# Altium PCB PCB_PROJECT.PcbDoc
Units mil, origin at the board's own origin, x right, y up, seen from the top; angles counter-clockwise.
Board outline 905.51 x 2594.49 mil, 4 copper layers (TOP, GND, VCC, BOTTOM), stack 60.756 mil thick; 50 components, 31 nets, 203 pads, 45 vias.
Unrouted connection lines stored in the file: 2.
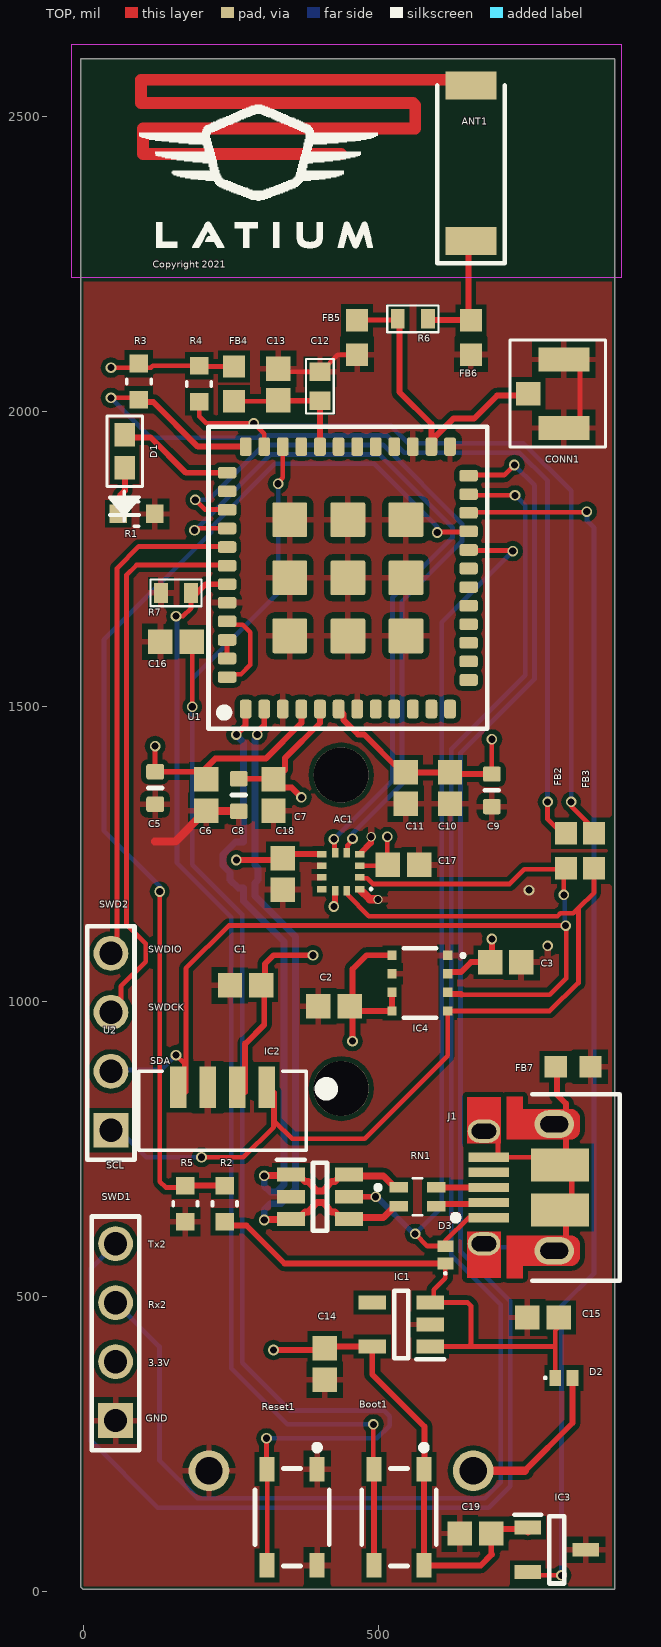
[diagram p0: TOP view]
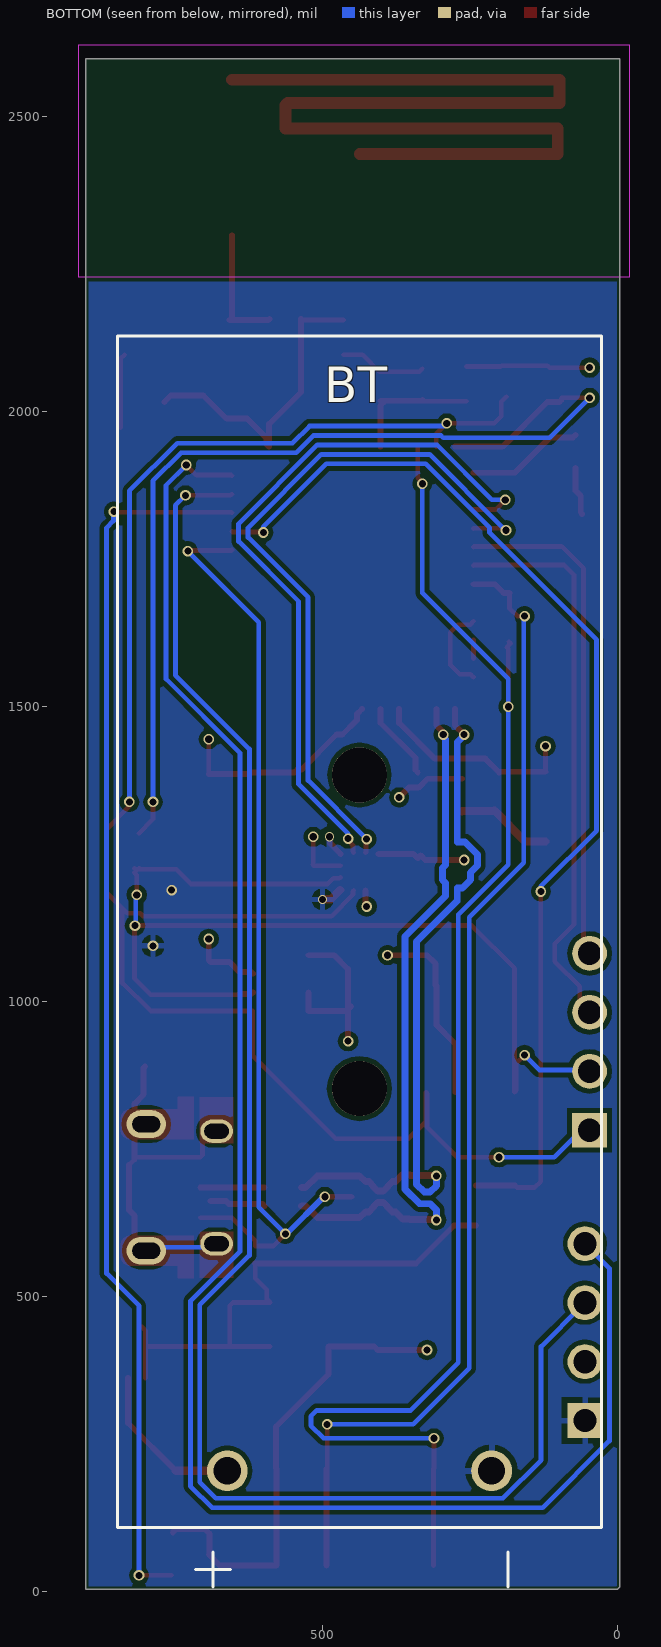
[diagram p1: BOTTOM view, seen from below]
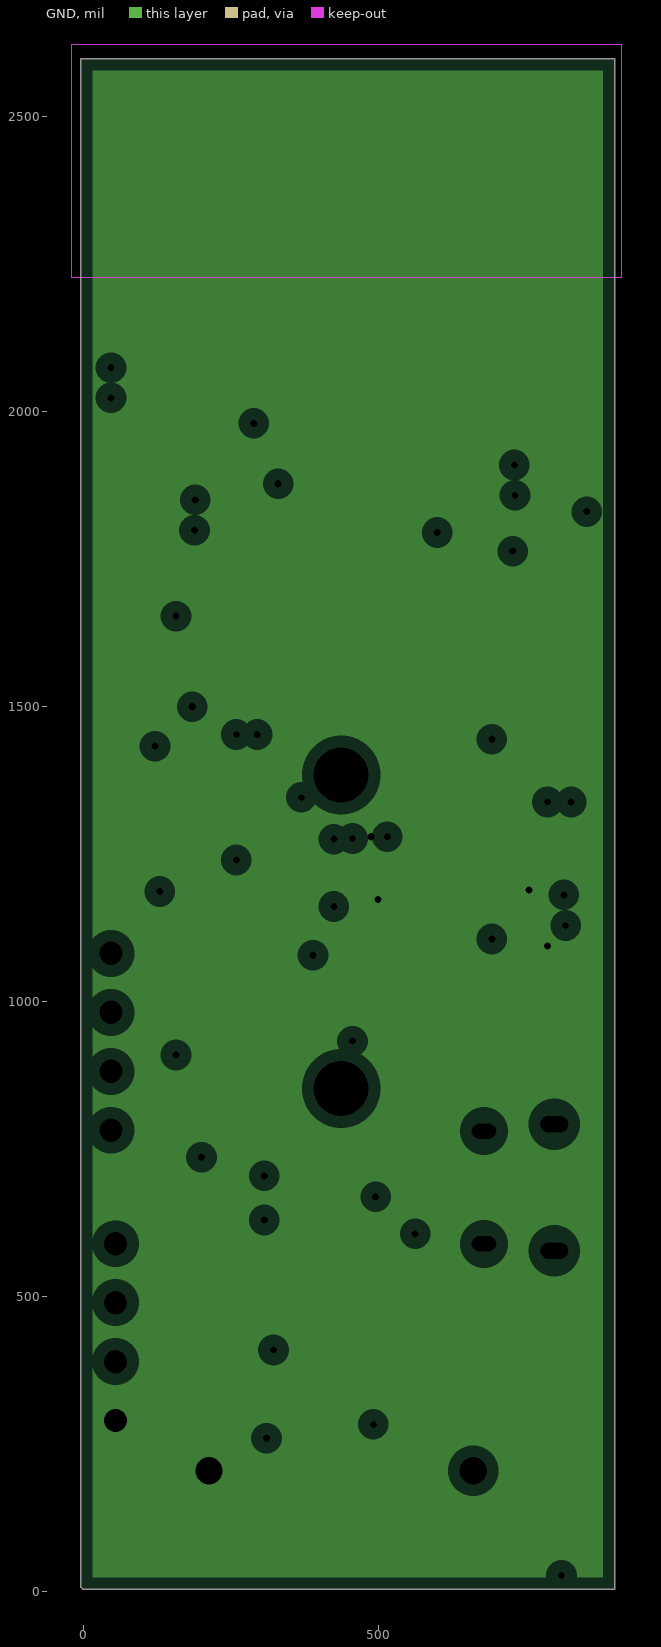
[diagram p2: GND, clearances drawn from the general rule]
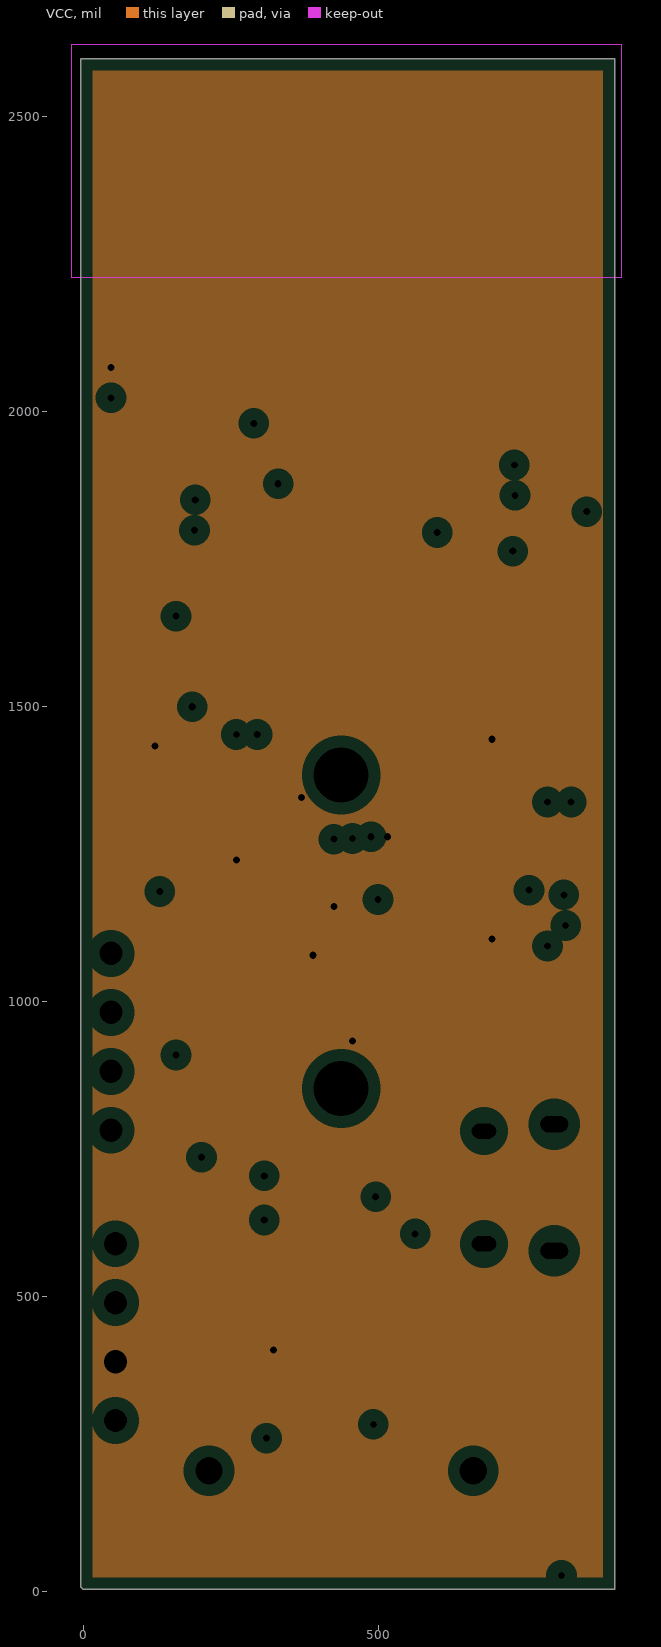
[diagram p3: VCC, clearances drawn from the general rule]
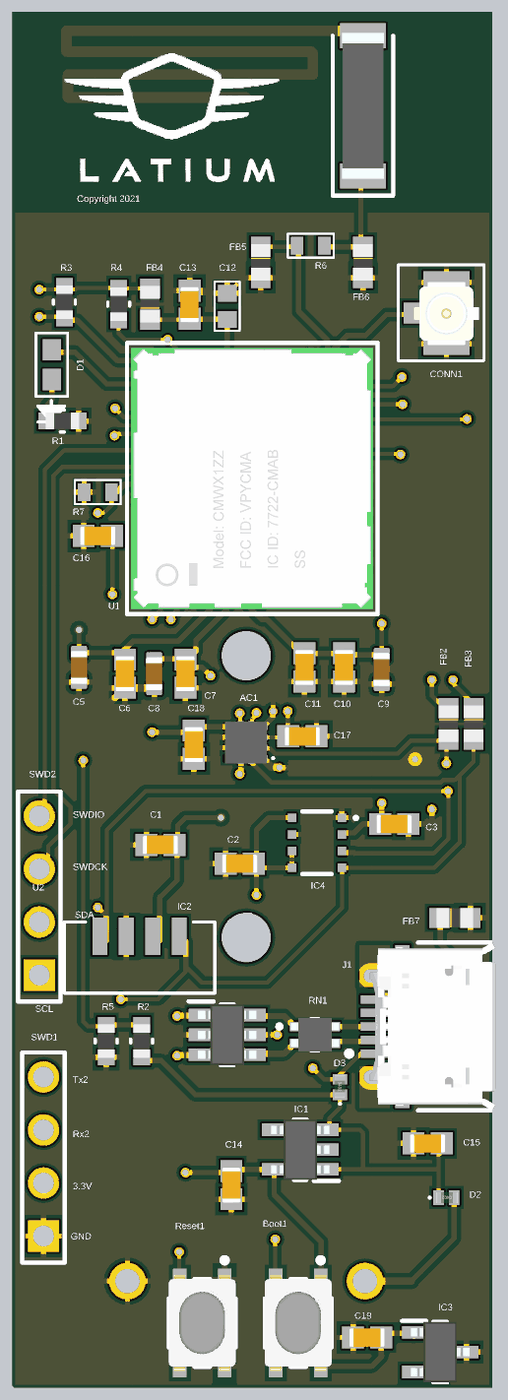
[diagram p4: 3D render of the assembled board from above, using the file's embedded part models]

## Layer stack, top to bottom
Top Solder: solder mask 0.4, Solder Resist, Dk 3.5
TOP: signal copper 1.4
Dielectric 1: core 9.1, 2116, Dk 4.2
GND: plane copper 1.378, net GND
Dielectric 3: prepreg 37, FR-4, Dk 4.2
VCC: plane copper 1.378, net 3V3
Dielectric 2: core 9.1, 2116, Dk 4.2
BOTTOM: signal copper 1.4
Bottom Solder: solder mask 0.4, Solder Resist, Dk 3.5

## Board outline
0,3.94 -3.94,7.87 -3.94,2598.43 901.57,2598.43 901.57,3.94

## Design rules (kind name [scope] priority, off if disabled: settings)
BoardOutlineClearance [All] p1: gap=5 ignorepadtopadclearanceinfootprint=FALSE
Clearance [All] p1: gap=8 ignorepadtopadclearanceinfootprint=TRUE
ComponentClearance [All] p1: gap=4 collisioncheckmode=3 verticalgap=4 showdistances=FALSE
DiffPairsRouting DiffPair_USBDiffPairsRouting [InDifferentialPair ('USB')] p1: maxlimit=8 minlimit=5 mostfreqgap=8 toplayer_minwidth=3.11 toplayer_maxwidth=13.58 toplayer_prefwidth=13.58 bottomlayer_minwidth=3.11 bottomlayer_maxwidth=13.58 bottomlayer_prefwidth=13.58 substack1={61CD507E-69E0-4F99-BC6C-F91D2F57CC11} substack2={735D745E-431D-49D2-AB04-4BDE5DF60375} substack3={4CBC7736-03FE-4B22-8C9A-F5819F3E1CB3} impedanceprofiledriven=TRUE impedanceprofileid={E19F0F90-F2E8-4607-B857-DBC723ACA318} impedanceprofilevalue=90.000000 maxuncoupledlength=500
DiffPairsRouting DiffPair_USBDiffPairsRouting_1 [InDifferentialPair ('NewDifferentialPair1')] p2: maxlimit=10 minlimit=10 mostfreqgap=10 toplayer_minwidth=15 toplayer_maxwidth=15 toplayer_prefwidth=15 bottomlayer_minwidth=15 bottomlayer_maxwidth=15 bottomlayer_prefwidth=15 maxuncoupledlength=500
DiffPairsRouting [All] p3: maxlimit=10 minlimit=10 mostfreqgap=10 toplayer_minwidth=15 toplayer_maxwidth=15 toplayer_prefwidth=15 bottomlayer_minwidth=15 bottomlayer_maxwidth=15 bottomlayer_prefwidth=15 maxuncoupledlength=500
HoleSize [All] p1: absolutevalues=TRUE maxlimit=400 minlimit=1 maxpercent=80.000 minpercent=20.000
MatchedLengths DiffPair_USBMatchedLengths [InDifferentialPair ('USB')] p1: tolerance=1000 checknetsindiffpair=FALSE checkdiffpairvsdiffpair=TRUE checkxsignals=TRUE checkothers=TRUE
MatchedLengths DiffPair_USBMatchedLengths_1 [InDifferentialPair ('NewDifferentialPair1')] p2: tolerance=1000 checknetsindiffpair=FALSE checkdiffpairvsdiffpair=TRUE checkxsignals=TRUE checkothers=TRUE
MinimumSolderMaskSliver [All] p1: minsoldermaskwidth=0
PlaneClearance [All] p1: clearance=20
PlaneConnect [All] p1: planeconnectstyle=Direct reliefexpansion=20 reliefentries=4 reliefconductorwidth=10 reliefairgap=10
PolygonConnect [All] p1: connectstyle=Relief reliefconductorwidth=10 reliefentries=4 polygonreliefangle="90 Angle" airgapwidth=10
RoutingVias [All] p1: holewidth=12 width=24 viastyle="Through Hole" minholewidth=12 minwidth=24 maxholewidth=12 maxwidth=24
SilkToSilkClearance [All] p1: silktosilkclearance=0
SilkToSolderMaskClearance [IsPad] p1: minsilkscreentomaskgap=0 clearancetoexposedcopper=TRUE
SolderMaskExpansion [All] p1: expansion=4
UnRoutedNet [All] p1: checkbadconnections=TRUE
Width [All] p1: maxlimit=16.32 minlimit=8 preferedwidth=10 substack1={61CD507E-69E0-4F99-BC6C-F91D2F57CC11} toplayer_{61cd507e-69e0-4f99-bc6c-f91d2f57cc11}_minwidth=10 toplayer_{61cd507e-69e0-4f99-bc6c-f91d2f57cc11}_maxwidth=10 bottomlayer_{61cd507e-69e0-4f99-bc6c-f91d2f57cc11}_minwidth=10 bottomlayer_{61cd507e-69e0-4f99-bc6c-f91d2f57cc11}_maxwidth=10 substack2={735D745E-431D-49D2-AB04-4BDE5DF60375} toplayer_{735d745e-431d-49d2-ab04-4bde5df60375}_minwidth=10 toplayer_{735d745e-431d-49d2-ab04-4bde5df60375}_maxwidth=10 bottomlayer_{735d745e-431d-49d2-ab04-4bde5df60375}_minwidth=10 bottomlayer_{735d745e-431d-49d2-ab04-4bde5df60375}_maxwidth=10 substack3={4CBC7736-03FE-4B22-8C9A-F5819F3E1CB3} toplayer_{4cbc7736-03fe-4b22-8c9a-f5819f3e1cb3}_minwidth=10 toplayer_{4cbc7736-03fe-4b22-8c9a-f5819f3e1cb3}_maxwidth=10 bottomlayer_{4cbc7736-03fe-4b22-8c9a-f5819f3e1cb3}_minwidth=10 bottomlayer_{4cbc7736-03fe-4b22-8c9a-f5819f3e1cb3}_maxwidth=10 minimp=50.000000 maximp=50.000000 favimp=50.000000
21 further rules are at their usual default settings.

## Classes and differential pairs
differential pair class USBDiffPair: USB
differential pair USB: +USB_P -USB_N

## Components (designator, comment, footprint, x,y, rotation, side; value= is the part's Value field where it differs from the comment)
AC1 "BMA490L" BMA280 437.01,1220.47 r180 top
ANT1 "0900AT43A0070E" ANTC7020X90N 657.48,2421.26 r90 top
Boot1 "PTS810SJM250SMTRLFS" FP-PTS810SJM250SMTRLFS-MFG 535.43,125.98 r270 top
BT "BC2AAAPC" BAT_BC2AAAPC 437.4,1118.31 r90 bottom
C1 "Capacitor 1 uF +/- 10% 25 V 0603" CAPC1608X90X40ML10T20 275.59,1027.56 r0 top value=1µF
C2 "Capacitor 100 nF +/-10% 50 V 0603" CAPC1608X90X40ML10T20 425.2,992.13 r0 top value=100nF
C3 "Capacitor 100 nF +/-10% 50 V 0603" CAPC1608X90X40ML10T20 716.54,1066.93 r180 top value=100nF
C5 "Capacitor 10µF +/-20% 10V 0603" CAPC0603(1608)100_L 122.05,1362.2 r90 top value=10µF
C6 "Capacitor 100 nF +/-10% 50 V 0603" CAPC1608X90X40ML10T20 208.66,1350.39 r90 top value=100nF
C7 "Capacitor 100 nF +/-10% 50 V 0603" CAPC1608X90X40ML10T20 322.83,1350.39 r90 top value=100nF
C8 "Capacitor 10µF +/-20% 10V 0603" CAPC0603(1608)100_L 263.78,1350.39 r90 top value=10µF
C9 "Capacitor 10µF +/-20% 10V 0603" CAPC0603(1608)100_L 692.91,1358.27 r90 top value=10µF
C10 "Capacitor 1 uF +/- 10% 25 V 0603" CAPC1608X90X40ML10T20 622.05,1362.2 r90 top value=1µF
C11 "Capacitor 100 nF +/-10% 50 V 0603" CAPC1608X90X40ML10T20 547.24,1362.2 r90 top value=100nF
C12 "10000PF" CAPC0603 401.57,2043.31 r270 top
C13 "Capacitor 1 uF +/- 10% 25 V 0603" CAPC1608X90X40ML10T20 330.71,2046.26 r90 top value=1µF
C14 "Capacitor 1 uF +/- 10% 25 V 0603" CAPC1608X90X40ML10T20 409.45,385.83 r270 top value=1µF
C15 "Capacitor 1 uF +/- 10% 25 V 0603" CAPC1608X90X40ML10T20 779.53,464.57 r180 top value=1µF
C16 "Capacitor 100 nF +/-10% 50 V 0603" CAPC1608X90X40ML10T20 157.48,1610.24 r180 top value=100nF
C17 "Capacitor 100 nF +/-10% 50 V 0603" CAPC1608X90X40ML10T20 543.31,1232.28 r180 top value=100nF
C18 "Capacitor 100 nF +/-10% 50 V 0603" CAPC1608X90X40ML10T20 338.58,1216.54 r90 top value=100nF
C19 "Capacitor 100 nF +/-10% 50 V 0603" CAPC1608X90X40ML10T20 665.35,98.43 r180 top value=100nF
CONN1 "U.FL-R-SMT-1" U.FL-R-SMT-1 814.96,2030.51 r270 top
D1 "APHD1608LQBC/D" "LED BLUE CLEAR [0603]" 70.87,1933.07 r90 top
D2 "SBR07U20LPS" CDBQR70HF 814.96,362.2 r0 top
D3 "SBR07U20LPS" CDBQR70HF 614.17,570.87 r90 top
FB2 "BLM18AG102SN1D" "Ferrite Bead" 818.9,1255.91 r270 top
FB3 "BLM18AG102SN1D" "Ferrite Bead" 866.14,1255.91 r270 top
FB4 "BLM18AG102SN1D" "Ferrite Bead" 255.91,2047.24 r90 top
FB5 "BLM18AG102SN1D" "Ferrite Bead" 464.57,2125.98 r270 top
FB6 "BLM18AG102SN1D" "Ferrite Bead" 657.48,2125.98 r270 top
FB7 "BLM18AG102SN1D" "Ferrite Bead" 830.71,889.76 r0 top
IC1 "TLV75533PDBVR" SOT95P280X145-5N 539.37,452.76 r180 top
IC2 "USBLC6-2SC6" SOT95P280X145-6N 401.57,669.29 r0 top
IC3 "SM353LT" SOT95P280X145-3N 803.15,70.87 r0 top
IC4 "BME680" BME680 570.87,1031.5 r180 top
J1 "10103594-0001LF" FCI-10103594-0001LF_V 744.09,685.04 r90 top
R1 "RES 4.7K 5% 0.1W [0603]" "RES 0603" 90.55,1826.77 r0 top
R2 "RES 27K 5% 0.1W [0603]" "RES 0603" 240.16,657.48 r270 top value=27K
R3 "RES 4.7K 5% 0.1W [0603]" "RES 0603" 94.49,2051.18 r90 top value=4.7K
R4 "RES 4.7K 5% 0.1W [0603]" "RES 0603" 196.85,2047.24 r90 top value=4.7K
R5 "RES 100K 5% 0.1W [0603]" "RES 0603" 173.23,657.48 r90 top value="100K Ohm"
R6 "RES 0 Ohm 5% 0.1W [0603]" RESC0603 559.06,2157.48 r0 top value="0 Ohm"
R7 "RES SMD 10K OHM 5% 0.1W 0603" RESC0603 157.48,1692.91 r0 top
Reset1 "PTS810SJM250SMTRLFS" FP-PTS810SJM250SMTRLFS-MFG 354.33,125.98 r270 top
RN1 "EXB34V220JX" EXB34V103JV 566.93,669.29 r270 top
SWD1 "68000-104HLF" 4POS_HEADER 55.12,389.76 r90 top
SWD2 "68000-104HLF" 4POS_HEADER 47.24,881.89 r90 top
U1 "TYPEABZ" CMWX1ZZABZ 448.82,1718.5 r90 top
U2 "VEML7700-TR" "Ambient Light Sensor with I2C" 236.22,814.96 r180 top

## Footprints (in the part's own frame and the unit in brackets; to place one, negate y for a bottom-side part, rotate by r counter-clockwise, add the part's x,y. Pads: shape width x height; smd on the part's side, far side on the other; paste and mask are expansions set on the pad)
4POS_HEADER [mm]
  rect 1.5x1.5 hole 1: 1(-2.54,0)
  round 1.5 hole 1: 2(0,0) 3(2.54,0) 4(5.08,0)
  silkscreen extent -3.81,-1.02 6.25,1.02, body extent -3.8,-1.03 3.83,1.03, height 11.34
"Ambient Light Sensor with I2C" [mil] "Ambient Light Sensor with I2C"
  rect 28x70 smd: 1(-75,-40) 2(-25,-40) 3(25,-40) 4(75,-40)
  silkscreen extent -186,-67 142,67, body extent -137,-62 138,62, height 91
ANTC7020X90N [mm]
  rect 1.2x2.2 smd: 1(-3.35,0) 2(3.35,0)
  silkscreen extent -4.3,-1.45 3.35,1.45, body extent -3.5,-1 3.5,1, height 0.9
BAT_BC2AAAPC [mm]
  round 1.755 hole 1.17: NEG(-23.205,-5.69) POS(-23.205,5.69)
  round 2.37 hole 2.37 unplated: ""(-6.745,0) ""(6.755,0)
  silkscreen extent -28.2,-10.41 25.66,10.41
BMA280 [mm]
  rect 0.41x0.28 smd: 1(-0.815,0.75) 2(-0.815,0.25) 3(-0.815,-0.25) 4(-0.815,-0.75) 7(0.815,-0.75) 8(0.815,-0.25) 9(0.815,0.25) 10(0.815,0.75)
  rect 0.28x0.41 smd: 5(-0.25,-0.815) 6(0.25,-0.815) 11(0.25,0.815) 12(-0.25,0.815)
  silkscreen extent -1.35,0.7 -1.25,0.8, body extent -1,-1 1,1, height 1.1
BME680 [mm]
  rect 0.4x0.4 smd: 1(-1.2,-1.2) 2(-1.2,-0.4) 3(-1.2,0.4) 4(-1.2,1.2) 5(1.2,1.2) 6(1.2,0.4) 7(1.2,-0.4) 8(1.2,-1.2)
  silkscreen extent -1.89,-1.5 0.7,1.5
CAPC0603 [mm] "Chip Capacitor 0603, 2-Leads, Body 1.60x0.80mm, IPC High Density"
  rect 0.8x0.9 smd: 1(-0.625,0) 2(0.625,0)
  silkscreen extent -1.17,-0.6 1.17,0.6, body extent -0.87,-0.48 0.87,0.48, height 0.85
CAPC0603(1608)100_L [mm] "Chip Capacitor, Body 1.6x0.8mm, Height 1.0mm, IPC High Density"
  rrect25% 0.66x0.76 smd: 1(-0.7,0) 2(0.7,0)
  silkscreen extent 0,-0.3 0,0.3, body extent -0.8,-0.4 0.8,0.4, height 0.95
CAPC1608X90X40ML10T20 [mm] "Chip Capacitor, 2-Leads, Body 1.70x0.90mm, IPC Low Density"
  rect 1.05x1.05 smd: 1(-0.675,0) 2(0.675,0)
  body extent -0.85,-0.45 0.85,0.45, height 0.9
CDBQR70HF [mm]
  rect 0.5x0.7 smd: 1(-0.375,0) 2(0.375,0)
  silkscreen extent -0.85,-0.05 -0.75,0.05, body extent -0.5,-0.25 0.55,0.25, height 0.32
CMWX1ZZABZ [mm] "muRata LoRa module"
  rrect40% 0.8x0.5 smd: 1(-5.65,4.4) 2(-5.65,3.6) 3(-5.65,2.8) 4(-5.65,2) 5(-5.65,1.2) 6(-5.65,0.4) 7(-5.65,-0.4) 8(-5.65,-1.2) 9(-5.65,-2) 10(-5.65,-2.8) 11(-5.65,-3.6) 12(-5.65,-4.4) 25(5.65,-4.4) 26(5.65,-3.6) 27(5.65,-2.8) 28(5.65,-2) 29(5.65,-1.2) 30(5.65,-0.4) 31(5.65,0.4) 32(5.65,1.2) 33(5.65,2) 34(5.65,2.8) 35(5.65,3.6) 36(5.65,4.4)
  rrect40% 0.5x0.8 smd: 13(-4.4,-5.2) 14(-3.6,-5.2) 15(-2.8,-5.2) 16(-2,-5.2) 17(-1.2,-5.2) 18(-0.4,-5.2) 19(0.4,-5.2) 20(1.2,-5.2) 21(2,-5.2) 22(2.8,-5.2) 23(3.6,-5.2) 24(4.4,-5.2) 37(4.525,5.2) 38(3.725,5.2) 39(2.925,5.2) 40(2.125,5.2) 41(1.325,5.2) 42(0.525,5.2) 43(-0.275,5.2) 44(-1.075,5.2) 45(-1.875,5.2) 46(-2.675,5.2) 47(-3.475,5.2) 48(-4.275,5.2)
  rrect10% 1.5x1.5 smd: 49(-2.5,2.5) 50(0,2.5) 51(2.5,2.5) 52(-2.5,0) 53(0,0) 54(2.5,0) 55(-2.5,-2.5) 56(0,-2.5) 57(2.5,-2.5)
  silkscreen extent -6.5,-6 6.5,6, body extent -6.25,-5.8 6.25,5.8, height 1.76
EXB34V103JV [mm]
  rect 0.45x0.8 smd: 1(-0.4,-0.8) 2(0.4,-0.8) 3(0.4,0.8) 4(-0.4,0.8)
  silkscreen extent -0.8,-1.8 0.8,0.2, body extent -0.8,-1.15 0.8,1.16, height 0.6
FCI-10103594-0001LF_V [mm] "SMD, 5-Leads, Body 8.04x5.62mm, Pitch 0.65 mm"
  rect 0.4x1.75 smd: 1(-1.3,1.435) 2(-0.65,1.435) 3(0,1.435) 4(0.65,1.435) 5(1.3,1.435)
  oval 1x1.4 hole 0.65 slot 1.05 at 90 deg: 6(-2.425,1.64) 7(2.425,1.64)
  oval 1.2x1.7 hole 0.7 slot 1.2 at 90 deg: 8(2.725,-1.39) 9(-2.725,-1.39)
  rect 1.425x2.5 smd: 10(-0.962,-1.64) 11(0.962,-1.64)
  TOP region: -3.9,0.91 -1.9,0.91 -1.9,2.37 -3.9,2.37
  TOP region: 3.9,2.37 1.9,2.37 1.9,0.91 3.9,0.91
  TOP region: -3.375,-0.04 -3.375,-2.09 -3.373,-2.129 -3.369,-2.167 -3.365,-2.185 -3.359,-2.203 -3.348,-2.239 -3.329,-2.277 -3.308,-2.312 -3.284,-2.344 -3.258,-2.374 -3.227,-2.401 -3.194,-2.426 -3.158,-2.446 -3.121,-2.464 -3.08,-2.477 -3.049,-2.483 -3.012,-2.488 -2.975,-2.49 -2.475,-2.49 -2.432,-2.488 -2.391,-2.482 -2.351,-2.471 -2.312,-2.456 -2.28,-2.439 -2.249,-2.421 -2.217,-2.397 -2.19,-2.37 -2.164,-2.342 -2.143,-2.312 -2.121,-2.277 -2.105,-2.241 -2.093,-2.209 -2.088,-2.192 -2.084,-2.175 -2.08,-2.155 -2.076,-2.134 -2.075,-2.112 -2.075,-2.09 -2.075,-0.04 -2.075,0.66 -3.9,0.66 -3.9,-0.04
  TOP region: 3.375,-0.04 3.375,-2.09 3.373,-2.129 3.369,-2.167 3.365,-2.185 3.359,-2.203 3.348,-2.239 3.329,-2.277 3.308,-2.312 3.284,-2.344 3.258,-2.374 3.227,-2.401 3.194,-2.426 3.158,-2.446 3.121,-2.464 3.08,-2.477 3.049,-2.483 3.012,-2.488 2.975,-2.49 2.475,-2.49 2.432,-2.488 2.391,-2.481 2.351,-2.471 2.312,-2.456 2.28,-2.439 2.249,-2.421 2.217,-2.396 2.19,-2.37 2.164,-2.342 2.143,-2.312 2.121,-2.277 2.105,-2.241 2.093,-2.209 2.088,-2.192 2.084,-2.175 2.08,-2.155 2.076,-2.134 2.075,-2.112 2.075,-2.09 2.075,-0.04 2.075,0.66 3.9,0.66 3.9,-0.04
  silkscreen extent -4.02,-4.21 4.02,2.98, body extent -4.02,-4.15 4.02,1.88, height 2.9
"Ferrite Bead" [mil]
  rect 38x37 smd: 1(-29.5,0) 2(29.5,0)
  body extent -34,-19 34,19, height 37
FP-PTS810SJM250SMTRLFS-MFG [mm]
  rect 1.05x0.65 smd paste+0 mask+0: 1(-2.075,1.075) 2(2.075,1.075) 3(-2.075,-1.075) 4(2.075,-1.075)
  silkscreen extent -3.12,-1.6 2.1,1.6, body extent -2.7,-1.7 2.7,1.7, height 0.25
"LED BLUE CLEAR [0603]" [mil] "LED BLUE CLEAR 0603 SMD"
  rect 40x35 smd: 1(-28,0) 2(28,0)
  silkscreen extent -118,-30 60,30, body extent -34,-14 34,14, height 28
"RES 0603" [mm]
  rect 0.756x0.8 smd: 1(-0.778,0) 2(0.778,0)
  silkscreen extent -0.09,-0.53 0.09,0.53, body extent -0.8,-0.4 0.8,0.4, height 0.71
RESC0603 [mm] "Chip Resistor 0603, 2-Leads, Body 1.60x0.82mm, IPC High Density"
  rect 0.6x0.85 smd: 1(-0.65,0) 2(0.65,0)
  silkscreen extent -1.1,-0.58 1.1,0.58, body extent -0.85,-0.48 0.85,0.48, height 0.6
SOT95P280X145-3N [mm]
  rect 1.15x0.6 smd: 1(-1.25,0.95) 2(-1.25,-0.95) 3(1.25,0)
  silkscreen extent -1.83,-1.45 0.33,1.5, body extent -1.4,-1.45 1.4,1.45, height 1.45
SOT95P280X145-5N [mm]
  rect 1.2x0.6 smd: 1(-1.25,0.95) 2(-1.25,0) 3(-1.25,-0.95) 4(1.25,-0.95) 5(1.25,0.95)
  silkscreen extent -1.85,-1.45 0.3,1.5, body extent -1.4,-1.45 1.4,1.45, height 1.45
SOT95P280X145-6N [mm]
  rect 1.2x0.6 smd: 1(-1.25,0.95) 2(-1.25,0) 3(-1.25,-0.95) 4(1.25,-0.95) 5(1.25,0) 6(1.25,0.95)
  silkscreen extent -1.85,-1.46 0.3,1.6, body extent -1.4,-1.46 1.4,1.46, height 1.45
U.FL-R-SMT-1 [mm]
  rect 1.05x2.2 smd: 1(-1.475,0) 2(1.475,0)
  rect 1x1.05 smd: 3(0,-1.525)
  silkscreen extent -2.31,-2.31 2.29,1.8, body extent -1.47,-1.55 1.53,1.55, height 1.25

## Part data
AC1: library part BMA280, "BMA490L Accelerometer", Manufacturer_Name="Bosch Sensortec", Mouser Part Number=262-BMA280, Arrow Part Number=BMA280, Arrow Price/Stock=https://www.arrow.com/en/products/bma280/bosch, ComponentLink1Description=docu, ComponentLink1URL=https://www.bosch-sensortec.com/media/boschsensortec/downloads/datasheets/bst-bma280-ds000.pdf, Datasheet Link=https://ae-bst.resource.bosch.com/media/_tech/media/datasheets/BST-BMA280-DS000.pdf, Height=1mm, Manufacturer_Part_Number=BMA280, Mouser Price/Stock=https://www.mouser.co.uk/ProductDetail/Bosch-Sensortec/BMA280?qs=d72FGnIDsgRcX8VH3KFYOw%3D%3D
ANT1: "Antenna", Manufacturer_Name="JOHANSON TECHNOLOGY", Datasheet Link=https://www.johansontechnology.com/datasheets/0900AT43A0070/0900AT43A0070.pdf, Height=0.9mm, Manufacturer_Part_Number=0900AT43A0070E
Boot1 Reset1: library part Button, "SWITCH TACTILE SPST-NO 0.05A 16V", Contact Current Rating=50mA, Contact Resistance=500mO, Manufacturer="C&K Components", Operating Force=160gf, Temperature="-40°C to +85°C", Temperature Range High=+85°C, Temperature Range Low=-40°C, Voltage Rating Dc=16V, Automotive=No, Category=Switch, ComponentLink2Description=Datasheet, ComponentLink2URL=https://www.ckswitches.com/media/1476/pts810.pdf, Device Class L1=Electromechanical, Device Class L2=Switches, Device Class L3="Tactile Switches", Digikey Description="SWITCH TACTILE SPST-NO 0.05A 16V", Electromechanical Life=150000Cycles, Height=2.7mm, Lead Free=Yes, Manufacturer Part Number=PTS810SJM250SMTRLFS, Mouser Description="Switch Tactile N.O. SPST Button J-Bend 0.05A 16VDC 150000Cycles 1.57N SMD T/R", Octopart=https://octopart.com/pts810+sjm+250+smtr+lfs-c%26k+components-29687929, Package=PTS810SJM250SMTRLFS, RoHS=TRUE, Throw Configuration=SPST
BT: "BATTERY HOLDER AAA 2 CELL PC PIN", Package=None, Availability=Unavailable, MF=MPD, MP=BC2AAAPC, Price=None, SnapEDA_Link=https://www.snapeda.com/parts/BC2AAAPC/MPD/view-part/4389080/?ref=snap
C1 C10 C13 C14 C15: library part CMP-001-00005-4, "Chip Capacitor, 1 uF, +/- 10%, 25 V, 0603 (1608 Metric)", Capacitor Type=Ceramic, Case/Package=0603, Max Operating Temperature=125°C, Min Operating Temperature=-55°C, Tolerance=10%, Voltage Rating=25V, Mounting Technology=SM, Pins=2, RoHS Compliant=True
C2 C3 C6 C7 C11 C16 C17 C18 C19: library part CMP-001-00017-4, "Chip Capacitor, 100 nF, +/- 10%, 50 V, 0603 (1608 Metric)", Capacitor Type=Ceramic, Case/Package=0603, Max Operating Temperature=125°C, Min Operating Temperature=-55°C, Tolerance=10%, Voltage Rating=50V, Mounting Technology=SM, Pins=2, RoHS Compliant=True
C5 C8 C9: library part CMP-001-00075-2, "Chip Capacitor, 10µF +/-20%, 10V, 0603, Thickness 1 mm", Case/Package=0402, Max Operating Temperature=85°C, Min Operating Temperature=-55°C, Tolerance=10%, Voltage Rating=10V, Mounting Technology=SMT, Pins=2
C12: library part GRM188R71H103KA01D, "CAP CER 10000PF 50V X7R 0603", Capacitance=10000pF, Manufacturer="Murata Electronics North America", Operating Temperature="-55°C ~ 125°C", Package / Case="0603 (1608 Metric)", Ratings=-, Supplier Part Number 1=490-1512-1-ND, Temperature Coefficient=X7R, Tolerance=±10%, Voltage - Rated=50V, Applications="General Purpose", Category=Capacitors, ComponentLink1Description=http://www.murata.com/~/media/webrenewal/support/library/catalog/products/capacitor/mlcc/c02e.ashx, ComponentLink1URL=http://www.murata.com/~/media/webrenewal/support/library/catalog/products/capacitor/mlcc/c02e.ashx, Features=-, Height - Seated (Max)=-, Lead Spacing=-, Lead Style=-, Manufacturer Part Number=GRM188R71H103KA01D, Mounting Type="Surface Mount, MLCC", Packaging="Cut Tape (CT)", Part Status=Active, Pricing 1="1=0.14, 10=0.031, 100=0.0135, 500=0.00966, 1000=0.00758 (CAD)", RoHS="RoHS Compliant", Size / Dimension="0.063\" L x 0.031\" W (1.60mm x 0.80mm)", Stock 1=5417714, Supplier 1=Digi-Key, Thickness (Max)="0.035\" (0.90mm)"
D1: library part "LED BLUE CLEAR 0603 SMD", "LED BLUE CLEAR 0603 SMD", Supplier Part Number 1=754-2034-1-ND, Datasheet=https://katalog.we-online.de/led/datasheet/150060BS75000.pdf, PN=150060BS75000, Supplier 1=Digi-Key
D2 D3: library part CDSQR4148-HF_1, "Diode", Arrow Part Number=CDSQR4148-HF, Manufacturer_Name="Comchip Technology", Mouser Part Number=750-CDSQR4148-HF, Arrow Price/Stock=https://www.arrow.com/en/products/cdsqr4148-hf/comchip-technology, ComponentLink1Description=SBR07U20LPS, ComponentLink1URL=https://www.diodes.com/assets/Datasheets/SBR07U20LPS.pdf, Datasheet Link=http://www.comchiptech.com/admin/files/product/CDSQR4148-HF-RevC213424.pdf, Height=0mm, Manufacturer_Part_Number=CDSQR4148-HF, Mouser Price/Stock=https://www.mouser.co.uk/ProductDetail/Comchip-Technology/CDSQR4148-HF?qs=2qJf6qQ4IOKNV97fk6Xvow%3D%3D
FB2 FB3 FB4 FB5 FB6 FB7: library part "Ferrite Bead", "Ferrite Bead 1KOhm @100MHz", Supplier Part Number 1=81-BLM11A102S, Datasheet=https://www.murata.com/en-us/products/productdata/8796738650142/ENFA0003.pdf?src-supplier=Digi-Key, PN=BLM18AG102SN1D, Supplier 1=Mouser
IC1: "Integrated Circuit", Manufacturer_Name="Texas Instruments", Mouser Part Number=595-TLV75533PDBVR, Arrow Part Number=TLV75533PDBVR, Arrow Price/Stock=https://www.arrow.com/en/products/tlv75533pdbvr/texas-instruments, Datasheet Link=http://www.ti.com/lit/gpn/tlv755p, Height=1.45mm, Manufacturer_Part_Number=TLV75533PDBVR, Mouser Price/Stock=https://www.mouser.co.uk/ProductDetail/Texas-Instruments/TLV75533PDBVR?qs=55YtniHzbhAKEwqeO2xJXQ%3D%3D
IC2: "Integrated Circuit", Manufacturer_Name=STMicroelectronics, Mouser Part Number=511-USBLC6-2SC6, Arrow Part Number=USBLC6-2SC6, Arrow Price/Stock=https://www.arrow.com/en/products/usblc6-2sc6/stmicroelectronics, Datasheet Link=http://www.st.com/st-web-ui/static/active/en/resource/technical/document/datasheet/CD00050750.pdf, Height=1.45mm, Manufacturer_Part_Number=USBLC6-2SC6, Mouser Price/Stock=https://www.mouser.co.uk/ProductDetail/STMicroelectronics/USBLC6-2SC6/?qs=po45yt2pPpu%2FhNIlwQdTlg%3D%3D
IC3: "Integrated Circuit", Manufacturer_Name=Honeywell, Mouser Part Number=785-SM353LT, Arrow Part Number=SM353LT, Arrow Price/Stock=https://www.arrow.com/en/products/sm353lt/honeywell, ComponentLink1Description=documentation, ComponentLink1URL=http://www.farnell.com/datasheets/2012450.pdf?_ga=2.245790722.741299232.1603476058-140605836.1598371586&_gac=1.141304070.1603476058.EAIaIQobChMItI734qXL7AIVmRatBh3JPwF_EAAYAiAAEgIk7PD_BwE, Datasheet Link=http://uk.rs-online.com/web/p/products/8252612, Height=1.45mm, Manufacturer_Part_Number=SM353LT, Mouser Price/Stock=https://www.mouser.co.uk/ProductDetail/Honeywell/SM353LT?qs=sJdZgDoFdSW3aINL1oUyuA%3D%3D
IC4: "Integrated Circuit", Manufacturer_Name="Bosch Sensortec", Mouser Part Number=262-BME680, Arrow Part Number=BME680, Arrow Price/Stock=https://www.arrow.com/en/products/bme680/bosch, Datasheet Link=https://ae-bst.resource.bosch.com/media/_tech/media/datasheets/BST-BME680-DS001-00.pdf, Manufacturer_Part_Number=BME680, Mouser Price/Stock=https://www.mouser.co.uk/ProductDetail/Bosch-Sensortec/BME680?qs=v271MhAjFHjo0yA%2FC4OnDQ%3D%3D
J1: library part CMP-002-00038-1, "Micro USB 2.0 B Receptacle, 5 Position, Height 3.24 mm, -55 to 85 degC, RoHS, Tape and Reel", Case/Package=FCI-10103594-0001LF, Current Rating=1.8A, Manufacturer="FCI Electronics", Max Operating Temperature=85°C, Min Operating Temperature=-55°C, Package Description="5-Pin Surface Mount Device, Body 8.04 x 5.62 mm", Package Quantity=1500, Voltage Rating=100V, Connector Type=USB, Contact Material=Copper, Contact Plating=Gold, Datasheet URL=http://portal.fciconnect.com/Comergent//fci/drawing/10103594.pdf, Datasheet Version="Rev. A, 06/2010", Gender=Female, Lead Pitch=0.65mm, Manufacturer URL=http://portal.fciconnect.com/, Mounting Technology=SM, Package Reference=FCI-10103594-0001LF, Packaging=TapeandReel, Pins=5, RoHS Compliant=True
R1: library part "RES 4.7K 1% [0603]", Resistance=4.7K, Supplier Part Number 1=P4.70KHCT-ND, Tolerance=1%, PN=ERJ-3EKF4701V, Supplier 1=Digi-Key
R2 R3: library part "RES 3.3M 1% 0.1W [0603]", Supplier Part Number 1=541-3.30MHCT-ND, Tolerance=5%, PN=CRCW06033M30FKEA, Supplier 1=Digi-Key
R4: library part "RES 3.3M 1% 0.1W [0603]", "RES 4.7K5% 0.1W [0603]", Supplier Part Number 1=541-3.30MHCT-ND, Tolerance=5%, PN=CRCW06033M30FKEA, Supplier 1=Digi-Key
R5: library part "RES 1M 1% 0.1W [0603]", Power=0.1W, Supplier Part Number 1=652-CR0603FX-1004ELF, Tolerance=5%, Datasheet=https://uk.rs-online.com/webdocs/0fcd/0900766b80fcdb72.pdf?src-supplier=RSComponents, PN=CR0603-FX-1004ELF, Supplier 1=Mouser
R6: library part "RES 0 Ohm [0603]", Supplier Part Number 1=667-ERJ-3GEY0R00V, Tolerance=5%, Datasheet=http://industrial.panasonic.com/cdbs/www-data/pdf/RDA0000/AOA0000C301.pdf?src-supplier=Farnell, Supplier 1=Mouser
R7: library part ERJ-PA3F1002V, Manufacturer="Panasonic Electronic Components", Operating Temperature="-55°C ~ 155°C", Package / Case="0603 (1608 Metric)", Power (Watts)="0.25W, 1/4W", Resistance (Ohms)=10k, Supplier Device Package=0603, Supplier Part Number 1=P10KBYDKR-ND, Temperature Coefficient=±100ppm/°C, Tolerance=±5%, Category=Resistors, ComponentLink1Description=https://industrial.panasonic.com/cdbs/www-data/pdf/RDO0000/AOA0000C291.pdf, ComponentLink1URL=https://industrial.panasonic.com/cdbs/www-data/pdf/RDO0000/AOA0000C291.pdf, Composition="Thick Film", Failure Rate=-, Features="Automotive AEC-Q200, Pulse Withstanding", Height - Seated (Max)="0.022\" (0.55mm)", Manufacturer Part Number=ERJ-PA3F1002V, Packaging=Digi-Reel®, Part Status=Active, Pricing 1="1=0.23, 10=0.205, 25=0.142, 50=0.1102, 100=0.0789, 250=0.06144, 500=0.04884, 1000=0.03467 (CAD)", RoHS="RoHS Compliant", Size / Dimension="0.063\" L x 0.031\" W (1.60mm x 0.80mm)", Stock 1=80783, Supplier 1=Digi-Key
RN1: library part EXB34V330JV, "Resistor Network", Manufacturer_Name=Panasonic, ComponentLink1Description=EXB24/34V, ComponentLink1URL=https://www.mouser.ca/datasheet/2/315/AOC0000C14-1108062.pdf, Datasheet Link=https://industrial.panasonic.com/cdbs/www-data/pdf/AOC0000/AOC0000C14.pdf, Height=0.5mm, Manufacturer_Part_Number=EXB34V330JV
SWD1 SWD2: "4 Positions Header, Unshrouded Connector 0.100\" (2.54mm) Through Hole Gold or Gold, GXT™", Colour=Black, Current Rating=3A, Flammability Rating="UL94 V-0", Insulation Resistance=5GR, Manufacturer 1="Amphenol FCI", Max Operating Temperature=125°C, Max Voltage Rating (AC)=1.5kV, Min Operating Temperature=-65°C, Package Quantity=100, Supplier Part Number 1=609-3248-ND, ComponentLink1Description=https://datasheet.ciiva.com/16726/68000-16726213.pdf, ComponentLink1URL=https://datasheet.ciiva.com/16726/68000-16726213.pdf, ComponentLink2Description=https://datasheet.ciiva.com/10149/68000-10149830.pdf, ComponentLink2URL=https://datasheet.ciiva.com/10149/68000-10149830.pdf, ComponentLink3Description=https://datasheet.ciiva.com/46395/1914865-46395854.pdf, ComponentLink3URL=https://datasheet.ciiva.com/46395/1914865-46395854.pdf, ComponentLink4Description=https://datasheet.ciiva.com/728/68000-728879.pdf, ComponentLink4URL=https://datasheet.ciiva.com/728/68000-728879.pdf, Connector Type="Male Pin", Contact Gender=Male, Contact Material=Bronze, Contact Mating Length=0.23inch, Contact Plating=Nickel,Gold,GXT, Depth=2.41mm, Description 1="4 Positions Header, Unshrouded Connector 0.100\" (2.54mm) Through Hole Gold or Gold, GXT™", Gender=Male, Housing Colour=Black, Housing Material=Thermoplastic, Length=10.16mm, Manufacturer Part Number 1=68000-104HLF, Mating Post Length=5.84mm, Mount="Through Hole", Number of Contacts=4, Number of Positions=4, Number of Rows=1, Orientation=Straight, Packaging=Bulk, Pitch=2.54mm, Pricing 1="1=0.33, 10=0.316, 100=0.2212, 500=0.18964, 1000=0.15803, 5000=0.13545, 10000=0.12642 (USD)", Radiation Hardening=No, REACH SVHC="No SVHC", Stock 1=10785, Supplier 1=Digi-Key, Termination=Solder, Termination Post Length=2.41mm, Voltage Rating=1.5kV
U1: "CMWX1ZZABZ-078", DeviceSetName=TYPEABZ, GateName_1=G$1, SymbolName_1=TYPEABZ
U2: library part "Ambient Light Sensor I2C", "VEML7700-TR, Ambient Light Sensor with I2C", Supplier Part Number 1=VEML7700CT-ND, ComponentLink1Description=VEML7700-TR, ComponentLink1URL=VEML7700-TR, Datasheet=https://media.digikey.com/pdf/Data%20Sheets/Vishay%20Semiconductors/VEML7700.pdf, PN=VEML7700-TR, Supplier 1=Digi-Key
CONN1: DeviceSetName=U.FL-R-SMT-1, GateName_1=G$1, LibraryName=Kris, SymbolName_1=U.FL-R-SMT-1

## Via types
v1: diameter 18, hole 12, TOP to BOTTOM, 41 vias
v2: diameter 16, hole 12, TOP to BOTTOM, 2 vias
v3: diameter 18, hole 12, TOP to BOTTOM, tented both sides, 2 vias

## Nets (pads, with @x,y where several pads share a name; then routed paths per layer and width w, separated by ;. In a path a pad name is that pad's centre, name@x,y a point inside that pad or via, vN(x,y) a via of type N, cw(c..) or ccw(c..) an arc to the next point about the centre after c; other vN are vias at no path point)
3V3: AC1.3 AC1.7 AC1.11 Boot1.1 Boot1.2 C1.2 C2.2 C3.2 C5.2 C6.2 C7.2 C8.2 C9.2 C10.2 C11.2 C14.1 C17.2 C18.2 C19.1 FB4.2 IC1.5 IC3.1 IC4.2 IC4.5 IC4.6 IC4.8 R3.2 R4.2 SWD1.2 U1.4 U1.5 U1.6 U2.2 | length 3012.7
  TOP w8: v1(47.24,2074.8) 115.05,2074.8 118.11,2077.87 R4.2 197.97,2076.74 FB4.2 ; C5.2 v3(122.05,1433.07) ; C6.2@200.79,1388.78 C6.2@201.77,1389.76 ; AC1.3 514.76,1230.31 C17.2 515.75,1233.27 v1(515.75,1279.53) ; Boot1.1 Boot1.1@578.74,208.66 ; C9.2 v1(692.91,1444.88)
  TOP w10: C5.2 199.8,1389.76 C6.2@200.79,1388.78 ; C6.2@201.77,1389.76 224.02,1412.01 309.65,1412.01 370.08,1472.44 U1.4 ; v1(259.84,1240.16) 325.79,1240.16 333.66,1248.03 C18.2 345.47,1250 AC1.7 ; C8.2 321.85,1377.95 C7.2 337.08,1362.72 353.82,1362.72 v1(370.08,1346.46) ; U2.2@274.41,846.46 274.41,929.13 275.59,929.13 307.09,960.63 307.09,1026.4 308.24,1027.56 308.24,1064.15 322.83,1078.74 v3(389.76,1078.74) ; v1(322.83,409.45) 406.5,409.45 C14.1 412.4,415.35 IC1.5 490.16,368.11 578.74,279.53 Boot1.1@578.74,208.66 ; C7.2@338.58,1388.78 342.52,1392.72 342.52,1413.39 401.57,1472.44 U1.5 ; v1@426.34,1162.57 v1(425.2,1161.42) 425.2,1163.04 427.17,1165.01 AC1.11 ; U1.6 441.72,1487.41 441.72,1477.24 466.21,1452.76 476.38,1452.76 535.43,1393.7 542.32,1393.7 C11.2 C10.2 625,1385.83 C9.2 ; C2.2 C2.2@455.71,988.19 ; v1(456.69,933.07) C2.2@456.69,987.2 ; IC4.6 IC4.5 459.65,984.25 C2.2@456.69,987.2 ; IC4.8 480.31,1078.74 456.69,1055.12 456.69,989.17 C2.2@455.71,988.19 ; Boot1.1 Boot1.2 674.21,44.29 692.91,62.99 691.93,62.99 C19.1 699.8,106.3 748.03,106.3 IC3.1@753.94,100.39 ; IC4.2 620.98,1050.12 640.67,1050.12 657.48,1066.93 C3.2 692.91,1069.88 v1(692.91,1106.3) ; C2.2@455.71,988.19 C2.2@456.69,987.2
A1: R2.1 R5.2 U1.21 | length 1874.7
  TOP w8: v1(129.92,1186.74) 129.92,695.13 140.01,685.04 170.17,685.04 R5.2 ; v1(600.39,1795.27) 606.3,1795.27 607.28,1796.26 652.56,1796.26 U1.21
  TOP w10: R5.2 R2.1
  BOTTOM w8: v1(129.92,1186.74) 129.92,1195.57 35.43,1290.06 35.43,1613.45 216.85,1794.87 216.85,1803.46 325.13,1911.74 493.77,1911.74 600.39,1805.12 v1(600.39,1795.27)
Ant: CONN1.3 FB5.1 R6.1 U1.26 | length 535.2
  TOP w8: FB5.1 534.42,2155.48 R6.1@536.42,2157.48
  TOP w10: R6.1@536.42,2157.48 536.42,2033.31 590.55,1979.18 590.55,1955.96 590.55,1945.79 U1.26 595.39,1945.79 595.39,1955.96 627.72,1988.29 662.65,1988.29 701.92,2027.56 757.05,2027.56 CONN1.3@767.79,2016.81
Boot: Boot1.3 Boot1.4 R7.2 U1.43 | length 1957.6
  TOP w8: v1(157.48,1653.54) 169.29,1653.54 183.07,1667.32 R7.2 ; v1(492.13,283.46) 492.13,208.66 Boot1.3
  TOP w10: R7.2 192.91,1692.91 207.68,1707.68 U1.43 ; Boot1.4 Boot1.3
  BOTTOM w8: v1(157.48,1653.54) 159.05,1651.98 159.05,1235.65 251.38,1143.32 251.38,378.54 346.46,283.46 v1(492.13,283.46)
GND: AC1.1 AC1.4 AC1.8 AC1.9 BT.NEG C1.1 C2.1 C3.1 C5.1 C6.1 C7.1 C8.1 C9.1 C10.1 C11.1 C12.1 C13.2 C14.2 C15.2 C16.2 C17.1 C18.1 C19.2 CONN1.1 CONN1.2 FB5.2 FB6.2 FB7.2 IC1.2 IC2.2 IC3.3 IC4.1 IC4.7 R1.2 R5.1 R7.1 Reset1.1 Reset1.2 SWD1.1 U1.3 U1.7 U1.25 U1.27 U1.44 U1.49 U1.50 U1.51 U1.52 U1.53 U1.54 U1.55 U1.56 U1.57 U2.3 | length 511.4
  TOP w8: C13.2 335.63,2067.91 C12.1 403.54,2067.91 432.11,2096.48 FB5.2 ; CONN1.1@835.6,2096.48 842.52,2089.57 CONN1.2@842.52,1973.43
  TOP w10: AC1.4 469.92,1250.83 469.92,1251.24 487.81,1269.13 487.81,1279.15 v2(488.19,1279.53)
  TOP w14: 122.05,1271.65 156.5,1271.65 C6.1 209.15,1323.33 263.29,1323.33 C8.1 ; AC1.1@470.17,1189.46 486.01,1173.61 499.62,1173.61 v2(500,1173.23)
  other v1: 787.4,1094.49 755.91,1188.98
LED: D1.2 U1.37 | length 199.9
  TOP w10: D1.2 75.24,1956.69 114.17,1956.69 174.21,1896.65 U1.37
NetAC1_5: AC1.5 U1.39 | length 1245.5
  TOP w8: v1(190.22,1850.66) 206.72,1834.15 243.6,1834.15 U1.39 ; AC1.5 448.36,1254.07 448.36,1265.09 456.69,1273.42 v1(456.69,1276.48)
  BOTTOM w8: v1(190.22,1850.66) 212.86,1850.66 305.95,1943.74 508.74,1943.74 642.3,1810.19 642.3,1780.09 540.57,1678.36 540.57,1368.34 456.69,1284.46 v1(456.69,1276.48)
NetAC1_6: AC1.6 U1.40 | length 1225.2
  TOP w8: v1(188.98,1799.21) 192.42,1802.66 243.6,1802.66 U1.40 ; v1(425.2,1275.59) 426.18,1274.61 426.18,1264.37 426.18,1253.54 AC1.6
  BOTTOM w8: v1@195.38,1804.62 318.5,1927.74 502.12,1927.74 626.3,1803.56 626.3,1786.99 524.57,1685.26 524.57,1374.96 v1(425.2,1275.59)
NetANT1_1: ANT1.1 FB6.1 R6.2 | length 214.1
  TOP w10: R6.2@589.57,2157.48 591.56,2155.48 653.54,2155.48 FB6.1 653.54,2159.42 ANT1.1@653.54,2299.21
NetBT_POS: BT.POS D2.2 | length 275.1
  TOP w10: 748.6,204.72 829.72,285.85 D2.2
  TOP w14: BT.POS@664.57,204.72 748.6,204.72
NetC12_2: C12.2 C13.1 FB4.1 U1.32 | length 227.9
  TOP w8: FB4.1 328.77,2017.74 C13.1
  TOP w10: C13.1 331.69,2018.7 C12.2@393.7,2018.7 ; U1.32 401.57,2010.83 C12.2@393.7,2018.7 ; C12.2 C12.2@393.7,2018.7
NetC15_1: C15.1 D2.1 D3.1 IC1.1 IC1.3 R2.2 | length 919.8
  TOP w8: IC1.1 653.54,415.35 ; D3.1 614.17,531.5 594.49,511.81 594.49,496.06 IC1.3 651.57,490.16 657.48,484.25 657.48,419.29 653.54,415.35 ; D2.1 800.2,415.35 ; C15.1@806.1,448.82 800.2,442.91 800.2,415.35 ; 653.54,415.35 800.2,415.35
  TOP w10: R2.2@240.16,620.66 276.98,620.66 341.54,556.1 D3.1
NetC16_1: C16.1 Reset1.3 Reset1.4 U1.34 | length 2503.8
  TOP w8: C16.1 181.1,1607.28 187.5,1600.89 185.04,1598.43 v1(185.04,1500) ; v1(311.02,259.84) 311.02,208.66 Reset1.3 Reset1.4 ; v1(330.71,1877.95) 330.71,1880.12 338.58,1887.99 U1.34
  BOTTOM w8: v1(311.02,259.84) 498.2,259.84 519.68,281.33 519.68,297.07 509.67,307.09 350.39,307.09 269.69,387.8 269.69,1147.64 185.04,1232.28 v1(185.04,1500) 185.04,1547.24 330.71,1692.91 v1(330.71,1877.95)
NetD1_1: D1.1 R1.1 | length 82.8
  TOP w10: R1.1 62.24,1829.09 62.24,1857.52 70.87,1866.14 D1.1
NetFB2_1: FB2.1 R3.1 U1.36 | length 1670.5
  TOP w8: v1(47.24,2023.62) R3.1@94.49,2023.62 ; v1(787.4,1338.58) 787.4,1309.03 FB2.1@811.02,1285.41
  TOP w10: R3.1 98.43,2016.62 118.98,2016.62 194.66,1940.94 U1.36
  BOTTOM w8: v1(47.24,2023.62) 115.12,1955.74 295.32,1955.74 299.32,1959.74 515.37,1959.74 544.4,1930.71 739.74,1930.71 787.4,1883.05 v1(787.4,1338.58)
NetFB3_1: FB3.1 R4.1 U1.35 | length 1362.6
  TOP w8: R4.1@188.24,2025.23 R4.1 196.85,1992.13 208.66,1980.31 v1(289.37,1980.31) 307.09,1962.6 U1.35 ; v1(827.34,1338.58) 827.34,1331.44 866.14,1292.63 FB3.1
  BOTTOM w8: v1(289.37,1980.31) 293.94,1975.74 522,1975.74 551.03,1946.71 746.37,1946.71 827.34,1865.75 v1(827.34,1338.58)
NetFB7_1: FB7.1 J1.5 J1.6 J1.7 J1.8 J1.9 J1.10 J1.11 | length 611.8
  TOP w8: J1.7@699.21,780.51 703.41,776.31 703.41,740.09 707.28,736.22 815.06,736.22 818.5,732.78 J1.11@828.35,722.93
  TOP w10: FB7.1 803.15,887.82 803.15,842.52 818.5,827.17 818.5,792.32 J1.11@818.5,732.78 ; J1.9@818.5,577.76 818.5,637.3 828.35,647.15 J1.11@828.35,722.93
  BOTTOM w8: J1.6@699.21,589.57 705.12,583.66 812.6,583.66 J1.9@818.5,577.76
NetIC3_2: IC3.2 U1.22 | length 2088.5
  TOP w8: U1.22 654.53,1829.72 852.78,1829.72 v1(853.77,1830.71) ; IC3.2@755.91,27.56 v1(811.02,27.56)
  BOTTOM w8: v1(811.02,27.56) 811.02,484.25 866.14,539.37 866.14,1803.15 854.39,1814.9 854.39,1831.33 v1(853.77,1830.71)
NetJ1_2: J1.2 RN1.3 | length 95
  TOP w10: RN1.3 602.07,657.19 658.67,657.19 663.39,661.91 J1.2@689.96,661.91
NetJ1_3: J1.3 RN1.4 | length 108.9
  TOP w10: RN1.4 J1.3@707.28,685.04
NetU1_45: U1.45 U1.48 | length 150.2
  TOP w8: U1.48 249.02,1555.12 267.72,1555.12 283.46,1570.87 283.46,1625.98 270.61,1638.84 249.94,1638.84 U1.45
NetU1_46: U1.46 U1.47 | length 31.5
  TOP w8: U1.47 U1.46
RX2: SWD1.3 U1.23 | length 2754.3
  TOP w8: U1.23 655.51,1858.27 v1(732.28,1858.27)
  BOTTOM w8: SWD1.3@59.06,484.25 60.63,484.25 129.5,415.39 129.5,222.79 194.11,158.18 680.7,158.18 707.96,185.44 707.96,485.82 623.97,569.82 623.97,1428.26 749.35,1553.64 749.35,1841.2 v1(732.28,1858.27)
SCL: AC1.12 FB3.2 IC4.4 SWD2.1 U2.1 | length 1720.9
  TOP w8: v1(200.79,736.22) 271.65,736.22 322.83,787.4 322.83,797.64 322.83,844.88 324.41,846.46 324.41,797.64 354.33,767.72 477.31,767.72 618.11,908.51 IC4.4 791.34,984.25 838.58,1031.5 839.95,1031.5 839.95,1158.85 ; AC1.12 448.36,1186.87 448.36,1181.12 484.51,1144.98 804.26,1144.98 809.26,1149.98 831.08,1149.98 839.95,1158.85 ; FB3.2 866.14,1185.04 839.95,1158.85
  BOTTOM w8: SWD2.1@59.06,784.25 107.09,736.22 v1(200.79,736.22)
SDA: AC1.2 FB2.2 IC4.3 SWD2.2 U2.4 | length 1838
  TOP w8: v1(157.48,909.45) 171.62,895.31 171.62,849.24 174.41,846.46 174.41,895.31 174.41,1056.3 247.09,1128.98 v1(817.95,1128.98) 818.9,1128.03 818.9,1039.37 791.34,1011.81 641.73,1011.81 ; AC1.2 470.61,1209.12 481.59,1209.12 491.09,1199.61 723.24,1199.61 748.03,1224.41 FB2.2@809.03,1224.41 ; v1(814.96,1181.1) 814.96,1214.59 818.9,1218.53 FB2.2@813.02,1224.41 ; FB2.2 816.9,1224.41 FB2.2@813.02,1224.41 ; FB2.2@809.03,1224.41 811.02,1226.41 FB2.2@813.02,1224.41 ; FB2.2@809.03,1224.41 FB2.2@813.02,1224.41
  TOP w10: IC4.3 620.98,1012.87 640.67,1012.87 641.73,1011.81
  BOTTOM w8: SWD2.2@59.06,884.25 132.28,884.25 v1(157.48,909.45) ; v1(814.96,1181.1) 816.46,1179.61 816.46,1130.47 v1(817.95,1128.98)
SWDCLK(TX3): SWD2.3 U1.42 | length 950
  TOP w8: SWD2.3@59.06,984.25 64.15,989.34 64.15,1025.78 106.3,1067.93 106.3,1098.43 73.55,1131.17 73.55,1723.16 90.55,1740.16 243.11,1740.16 U1.42
SWDIO(RX3): SWD2.4 U1.41 | length 853.3
  TOP w8: SWD2.4@59.06,1084.25 57.55,1085.76 57.55,1734.72 94.49,1771.65 243.11,1771.65 U1.41
TX2: SWD1.4 U1.24 | length 3040.9
  TOP w8: U1.24 654.53,1892.72 714.04,1892.72 v1(731.04,1909.71)
  BOTTOM w8: SWD1.4 13.59,548.24 13.59,255.27 126.68,142.18 687.33,142.18 723.96,178.82 723.96,492.45 639.97,576.44 639.97,1421.64 765.35,1547.01 765.35,1875.41 v1(731.04,1909.71)
USB_N: IC2.3 IC2.4 RN1.2 U1.2 | length 1198.5
  TOP w10: v1(295.28,1452.76) 295.28,1456.54 307.09,1468.36 U1.2
  TOP w11.65: v1(307.09,629.92) 311.02,629.92 312.01,630.91 351.38,630.91 IC2.3 364.17,631.89 375.94,643.66 381.71,643.66 389.81,651.75 389.81,652.65 396.63,659.47 406.52,659.47 413.34,652.65 413.34,651.75 421.44,643.66 427.21,643.66 437.01,633.86 508.86,633.86 528.54,653.54 RN1.2
  BOTTOM w11.65: v1(295.28,1452.76) 295.28,1448.86 291.32,1444.9 291.32,1231.89 296.81,1226.4 296.81,1206.67 291.32,1201.18 291.32,1178.99 360.14,1110.17 360.14,682.01 335.63,657.5 317.85,657.5 307.09,646.74 v1(307.09,629.92)
USB_P: IC2.1 IC2.6 RN1.1 U1.1 | length 1207.9
  TOP w10: v1(259.84,1452.76) 275.59,1468.5 U1.1
  TOP w11.65: v1(307.09,704.72) 311.02,704.72 311.86,705.56 351.23,705.56 IC2.1 364.17,706.69 375.94,694.93 381.71,694.93 389.81,686.83 389.81,685.94 396.63,679.11 406.52,679.11 413.34,685.94 413.34,686.83 421.44,694.93 427.21,694.93 437.01,704.72 508.86,704.72 528.54,685.04 RN1.1
  BOTTOM w11.65: v1(259.84,1452.76) 259.84,1451.59 271.67,1439.76 271.67,1270.85 258.26,1270.85 237.02,1249.61 237.02,1230.7 249.16,1218.56 249.16,1206.67 263.12,1192.71 271.67,1192.71 271.67,1170.86 340.49,1102.04 340.49,690.15 327.49,677.15 317.85,677.15 307.09,687.91 v1(307.09,704.72)
VBUS: D3.2 IC2.5 J1.1 U1.20 | length 1617.9
  TOP w8: v1(562.99,606.3) 583.66,585.63 D3.2 614.17,594.49 653.54,633.86 J1.1@707.28,633.86 ; U1.20 654.53,1764.76 727.36,1764.76 v1(728.35,1763.78)
  TOP w10: IC2.5 v1(496.06,669.29)
  BOTTOM w8: v1(562.99,606.3) 607.97,651.28 607.97,1643.4 v1(728.35,1763.78)
  BOTTOM w10: v1(496.06,669.29) 498.03,669.29 561.02,606.3 v1(562.99,606.3)
pads on no net: AC1.10 ANT1.2 BT. IC1.4 J1.4 U1.8 U1.9 U1.10 U1.11 U1.12 U1.13 U1.14 U1.15 U1.16 U1.17 U1.18 U1.19 U1.28 U1.29 U1.30 U1.31 U1.33 U1.38
copper on no net: | length 1940.6
  TOP w20: 437.01,2437.01 381.89,2437.01 101.38,2437.01 101.38,2447.83 101.38,2469.49 101.38,2480.31 562.99,2480.31 562.99,2519.69 559.06,2523.62 98.43,2523.62 98.43,2562.99 580.24,2562.99 653.54,2562.99

## Polygon pours and split planes (outlines as drawn)
GND on BOTTOM "BOTTOM-GNDA 1" (solid, remove dead copper, pour order 14): -10.28,7.82 914.63,3.88 914.63,2307.09 -10.28,2307.09
no net on BOTTOM "BOTTOM-GNDA" (solid, pour order 16): 1027.56,1468.5
no net on BOTTOM "Bottom Layer-No Net" (solid, pour order 0): 279.53,2102.36
GND on TOP "TOP-GNDB" (solid, remove dead copper, pour order 18): -7.87,7.87 905.51,7.87 905.51,2248.03 -7.87,2248.03
no net on TOP "Top Layer-No Net" (solid, pour order 2): 1590.55,1224.41
GND on GND (split plane): 881.48,24.03 16.16,24.03 16.16,2578.33 881.48,2578.33
3V3 on VCC (split plane): 881.48,24.03 16.16,24.03 16.16,2578.33 881.48,2578.33

## Keep-outs
Keep-Out Layer:
  rectangle: -19.68,2228.35 913.39,2622.05

## Other copper
BOTTOM:
  region: 240.16,1256.68
  region: 240.16,1256.68

## Silkscreen, mask and mechanical layers (free items; w line width, h text height)
Top Overlay:
  drawing of 7 lines, arcs and shapes, not listed
  text "Copyright 2021" at 118.11,2240.16 h20
  text "SWDIO" at 110.24,1078.74 h20
  text "SWDCK" at 110.24,980.31 h20
  text "SDA" at 114.17,889.76 h20
  text "SCL" at 39.37,712.6 h20
  text "Tx2" at 110.24,578.74 h20
  text "Rx2" at 110.24,476.38 h20
  text "3.3V" at 110.24,377.95 h20
  text "GND" at 106.3,283.46 h20
Mechancial 1:
  drawing of 386 lines, arcs and shapes, not listed
  text "1305 CHESTER IND. PARKWAY AVON, OHIO 44011-1083 U.S.A." at -3714.41,-3998.62 h20
  text "PH#: 1-800-248-1233, 440-934-0444 FAX#: 440-934-0088" at -3714.4,-3998.69 h20
Top 3D Body:
  text "D" at -3713.58,-3992.52 h20
  text "C" at -3713.58,-3994.47 h20
  text "B" at -3713.58,-3996.42 h20
  text "TWO PLACE DECIMAL:" at -3718.79,-3998.45 h20
  text "TOLERANCES: ANGULAR:" at -3718.76,-3998.35 h20
  text "DIMENSIONS ARE IN: INCHES[mm]" at -3718.67,-3998.25 h20
  text "UNLESS OTHERWISE SPECIFIED:" at -3718.67,-3998.15 h20
  text ".010" at -3718.23,-3998.45 h20
  text "2" at -3718.2,-3998.35 h20
  text "WP-20BF*15-PCB" at -3717.86,-3998.27 h20
  text "MATERIAL" at -3717.86,-3998.46 h20
  text "PART  NO." at -3717.86,-3998.14 h20
  text "A" at -3713.58,-3998.37 h20
  text "CAD FILE: WP-20BF+15-PCB" at -3719.44,-3999.32 h20
  text "THREE PLACE DECIMAL:" at -3718.79,-3998.55 h20
  text "PRINTED GRAPHICS:" at -3718.78,-3998.64 h20
  text "PROPRIETARY AND CONFIDENTIAL" at -3718.68,-3998.75 h20
  text "DRAWING IS THE SOLE PROPERTY OF" at -3718.68,-3998.94 h20
  text "THE INFORMATION CONTAINED IN THIS" at -3718.67,-3998.84 h20
  text "PERMISSION OF POLYCASE IS PROHIBITED." at -3718.67,-3999.22 h20
  text "POLYCASE.  ANY REPRODUCTION IN PART" at -3718.67,-3999.03 h20
  text "OR AS A WHOLE WITHOUT THE WRITTEN" at -3718.67,-3999.13 h20
  text ".010" at -3718.28,-3998.64 h20
  text ".005" at -3718.21,-3998.55 h20
  text "FLAME RATING" at -3717.86,-3998.8 h20
  text "CHECKED" at -3717.83,-3999.32 h20
  text "DRAWN" at -3717.79,-3999.21 h20
  text "NAME" at -3717.13,-3999.09 h20
  text "D.M.F." at -3717.13,-3999.21 h20
  text "C.C.B." at -3717.13,-3999.32 h20
  text "DATE" at -3716.66,-3999.09 h20
  text "8/12/2011" at -3716.65,-3999.2 h20
  text "8/16/2011" at -3716.65,-3999.32 h20
  text "A" at -3716.32,-3998.93 h20
  text "SIZE" at -3716.31,-3998.79 h20
  text "SCALE: 1:1" at -3716.3,-3999.25 h20
  text "PCB TEMPLATE  FOR WP-" at -3715.14,-3998.79 h20
  text "20BF*15" at -3715.14,-3998.91 h20
  text "SHEET 1 OF 1" at -3714.5,-3999.25 h20
  text "REV" at -3714.09,-3998.79 h20
  text "-" at -3713.97,-3998.93 h20
  text "5" at -3722.84,-3999.5 h20
  text "4" at -3720.78,-3999.5 h20
  text "3" at -3718.72,-3999.5 h20
  text "2" at -3716.66,-3999.5 h20
  text "1" at -3714.6,-3999.5 h20
Top Courtyard:
  drawing of 146 lines, arcs and shapes, not listed
  text ".063" at -3719.55,-3992.87 h20
  text "2X R" at -3723.26,-3994.09 h20
  text ".292" at -3722.92,-3994.09 h20
  text ".988" at -3721.98,-3994.03 h20 r90
  text ".634" at -3721.8,-3994.09 h20 r90
  text ".614" at -3721.61,-3994.03 h20 r90
  text "0" at -3720.99,-3994.03 h20 r90
  text ".614" at -3720.51,-3994.03 h20 r90
  text ".634" at -3720.25,-3994.09 h20 r90
  text ".988" at -3720.01,-3994.03 h20 r90
  text "2X" at -3719.62,-3994.09 h20
  text "1.106" at -3719.44,-3994.48 h20
  text ".135" at -3719.19,-3994.09 h20
  text ".752" at -3719.5,-3994.83 h20
  text ".378" at -3719.5,-3995.3 h20
  text ".394" at -3719.44,-3995.01 h20
  text ".378" at -3719.5,-3995.93 h20
  text ".752" at -3719.5,-3996.34 h20
  text ".394" at -3719.44,-3996.12 h20
  text "0" at -3719.44,-3995.58 h20
  text "2X R" at -3722.91,-3996.81 h20
  text "8X R" at -3722.67,-3997.14 h20
  text ".272" at -3722.57,-3996.81 h20
  text ".082" at -3722.33,-3997.14 h20
  text "1.106" at -3719.44,-3996.69 h20
  text "1." at -3719.38,-3997.77 h20
  text "NOTES:" at -3719.38,-3997.56 h20
  text "INCLUDES" at -3719.19,-3997.77 h20
  text ".030" at -3718.34,-3997.76 h20
  text "CLEARANCE FROM INTERIOR OF WP-20BF*15." at -3717.96,-3997.77 h20
  text "REV." at -3723.91,-3999.18 h20
  text "DESCRIPTION" at -3722.8,-3999.18 h20
  text "REVISIONS" at -3721.97,-3999.3 h20
  text "ZONE" at -3721.23,-3999.18 h20
  text "BY" at -3720.79,-3999.18 h20
  text "APPR'D" at -3720.52,-3999.18 h20
  text "DATE" at -3719.92,-3999.18 h20
Mechanical 29:
  lines w10: 901.57,0 901.57,2598.43 ; 905.51,0 0,0 0,2598.43 905.51,2598.43

## Text inside footprints (layer, text, board x,y; h text height)
J1: Mechancial 1 "PCB Edge" at 855.51,859.25 h20 r90